# Altium PCB LKS_Motor_0406.PcbDoc (part 1 of 4)
Units mm, origin at the board's own origin, x right, y up, seen from the top; angles counter-clockwise.
Board outline 117 x 10 mm, 2 copper layers (Top Layer, Bottom Layer); 114 components, 77 nets, 340 pads, 169 vias.
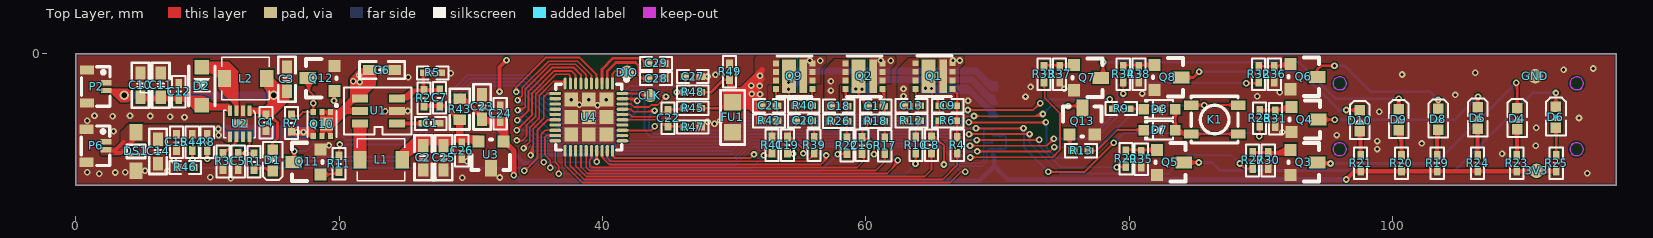
[diagram p0: Top Layer view]
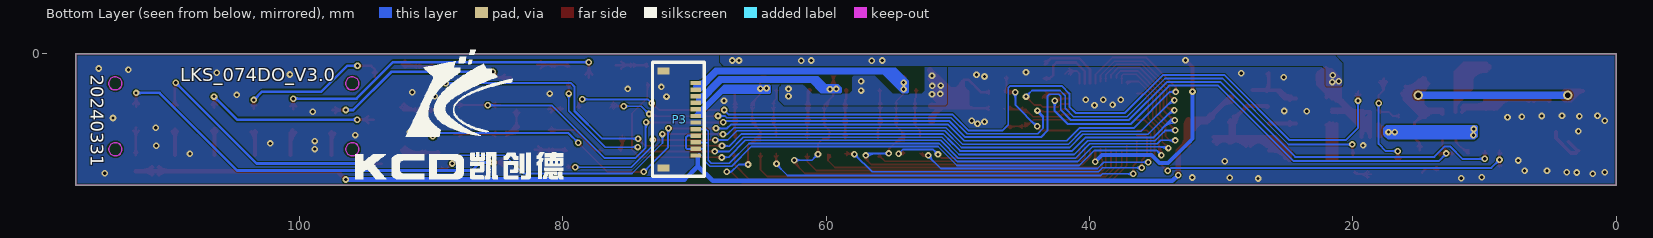
[diagram p1: Bottom Layer view, seen from below]
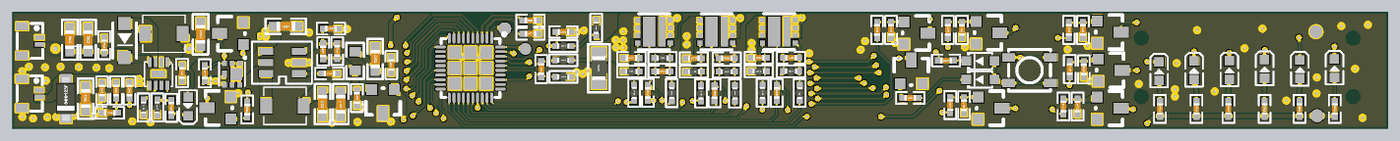
[diagram p5: 3D render of the assembled board from above, using the file's embedded part models]

## Layer stack, top to bottom
Top Solder: solder mask 0.0102, Solder Resist, Dk 3.5
Top Layer: signal copper 0.0356
Dielectric1: core 0.32, FR-4, Dk 4.8
Bottom Layer: signal copper 0.0356
Bottom Solder: solder mask 0.0102, Solder Resist, Dk 3.5

## Board outline
0,-10 0,0 117,0 117,-10

## Design rules (kind name [scope] priority, off if disabled: settings)
Clearance [All] p1: gap=0.1 ignorepadtopadclearanceinfootprint=FALSE except(0: Arc-Hole Track-Hole SMDPad-Hole THPad-Hole Via-Hole Fill-Hole Poly-Hole Region-Hole Text-Hole)
ComponentClearance [All] p1 off: gap=0.254 collisioncheckmode=3 verticalgap=0.254 showdistances=FALSE
FabricationTestpoint [(IsPad And (OnTopLayer Or OnBottomLayer))] p1: side=3 testpointundercomponent=TRUE minsize=1.016 maxsize=2.54 preferedsize=1.524 minholesize=0 maxholesize=1.016 preferedholesize=0.813 testpointgrid=0.025 allowsidetop=TRUE allowsidebottom=TRUE usegrid=TRUE gridtolerance=0
HoleSize [All] p1: absolutevalues=TRUE maxlimit=5.08 minlimit=0.025 maxpercent=80.000 minpercent=20.000
HoleToHoleClearance [All] p1: gap=0.127 allowstackedmicrovias=TRUE
MinimumSolderMaskSliver [All] p1 off: minsoldermaskwidth=0.127
PlaneClearance [All] p1: clearance=0.178
PlaneConnect [All] p1: planeconnectstyle=Direct reliefexpansion=0.508 reliefentries=4 reliefconductorwidth=0.254 reliefairgap=0.254
PolygonConnect [All] p1: connectstyle=Direct reliefconductorwidth=0.254 reliefentries=4 polygonreliefangle="90 Angle" airgapwidth=0.254
RoutingVias [All] p1: holewidth=0.457 width=0.762 viastyle="Through Hole" minholewidth=0.2 minwidth=0.5 maxholewidth=1 maxwidth=2
SilkToSilkClearance [All] p1 off: silktosilkclearance=0
SilkToSolderMaskClearance SilkscreenOverComponentPads [IsPad] p1 off: minsilkscreentomaskgap=0.127 clearancetoexposedcopper=TRUE
SolderMaskExpansion [All] p1: expansion=0.102 istentingtop=FALSE
Width [All] p1: maxlimit=2.54 minlimit=0.127 preferedwidth=0.203
21 further rules are at their usual default settings.

## Components (designator, comment, footprint, x,y, rotation, side; value= is the part's Value field where it differs from the comment)
3V3 "test" piot#1 110.947,-8.89 r0 top
C1 "1uF/16V" "C 0402_M" 26.975,-5.283 r180 top
C2 "10uF/16V" "C 0603_M" 26.391,-7.899 r90 top
C3 "22uF/25V" "C 0603_M" 16.027,-1.93 r270 top
C4 "1uF/25V" "C 0402_M" 14.453,-5.232 r270 top
C5 "103" "R 0402_M" 12.344,-8.179 r90 top
C6 "10uF/16V" "C 0603_M" 23.266,-1.245 r180 top
C7 "10pF/16V" "C 0402_M" 27.635,-3.353 r270 top
C8 "4.7uF/25V" "C 0402_M" 64.999,-6.934 r270 top
C9 "1nF" "C 0402_M" 66.221,-3.943 r0 top
C10 "22uF/25V" "C 0603_M" 4.902,-2.388 r270 top
C11 "22uF/25V" "C 0603_M" 6.452,-2.388 r270 top
C12 "4.7uF/25V" "C 0402_M" 7.823,-2.87 r270 top
C13 "1nF" "C 0402_M" 63.475,-3.943 r0 top
C14 "22uF/25V" "C 0603_M" 6.248,-7.417 r90 top
C15 "1uF/25V" "C 0402_M" 7.645,-6.731 r90 top
C16 "4.7uF/25V" "C 0402_M" 59.715,-6.96 r270 top
C17 "1nF" "C 0402_M" 60.755,-3.978 r0 top
C18 "1nF" "C 0402_M" 57.961,-3.978 r0 top
C19 "4.7uF/25V" "C 0402_M" 54.051,-6.934 r270 top
C20 "1nF" "C 0402_M" 55.294,-5.096 r0 top
C21 "1nF" "C 0402_M" 52.653,-3.953 r0 top
C22 "NC" "C 0402_M" 44.983,-4.902 r90 top
C23 "10uF/10V" "C 0603_M" 30.861,-4.039 r270 top
C24 "100nF" "C 0402_M" 32.233,-4.547 r90 top
C25 "10uF/10V" "C 0603_M" 27.94,-7.899 r90 top
C26 "100nF/10V" "C 0402_M" 29.312,-7.366 r270 top
C27 "1nF/50V" "C 0402_M" 46.863,-1.727 r180 top
C28 "100nF/50V" "C 0402_M" 44.069,-1.88 r0 top
C29 "1uF/10V" "C 0402_M" 44.069,-0.737 r180 top
CLK "test" piot#2 43.637,-3.175 r0 top
D1 "LED_R" 0603-LED 14.884,-8.179 r90 top
D2 "SS34" SOD123FL 9.576,-2.235 r270 top
D3 "4148" SOD-323 82.321,-4.216 r0 top
D4 "LED_R" 0603-LED 109.55,-4.851 r270 top
D5 "LED_R" 0603-LED 106.553,-4.801 r270 top
D6 "LED_R" 0603-LED 112.497,-4.75 r270 top
D7 "4148" SOD-323 82.321,-5.791 r0 top
D8 "LED_R" 0603-LED 103.556,-4.902 r270 top
D9 "LED_R" 0603-LED 100.559,-4.928 r270 top
D10 "LED_R" 0603-LED 97.587,-5.004 r270 top
DIO "test" piot#1 41.885,-1.448 r0 top
DS1 "SMF12CA-MS" SOD-123F 4.572,-7.417 r90 top
FU1 "0.05R" "R 0805_M" 49.886,-4.826 r90 top
GND "test" piot#1 110.846,-1.702 r0 top
K1 "K1" SMD3.3X3.3X2 86.5,-5 r0 top
L1 "6.8uH" "SMD3.5X3 .2- duplicate" 23.19,-8.052 r0 top
L2 "4.7uH" "SMD3.5X3 .2- duplicate" 12.903,-1.88 r0 top
P2 "Header 2" CONN_SMD_2P_0.6 1.448,-2.515 r270 top
P3 "Header 12" SMD-12 69.901,-7.722 r90 bottom
P6 "Header 2" CONN_SMD_2P_0.6 1.422,-7.01 r270 top
Q1 "CJBM3020" DFN-3X3_8 66.577,-2.672 r90 top
Q2 "CJBM3020" DFN-3X3_8 61.263,-2.681 r90 top
Q3 "J3Y" SOT-23 92.253,-7.29 r270 top
Q4 "J3Y" SOT-23 92.329,-4.039 r270 top
Q5 "J3Y" SOT-23 82.118,-7.29 r270 top
Q6 "J3Y" SOT-23 92.253,-0.787 r270 top
Q7 "J3Y" SOT-23 75.819,-0.864 r270 top
Q8 "J3Y" SOT-23 81.94,-0.838 r270 top
Q9 "CJBM3020" DFN-3X3_8 55.955,-2.681 r90 top
Q10 "CJMP2011" DFN-6-2X2 18.44,-5.08 r180 top
Q11 "J3Y" SOT-23 18.593,-9.169 r90 top
Q12 "J3Y" SOT-23 19.66,-2.819 r90 top
Q13 "J3Y" SOT-23 75.489,-6.147 r0 top
R1 "4.7K" "C 0402_M" 13.538,-8.204 r270 top
R2 "2.5M" "C 0402_M" 26.441,-3.378 r90 top
R3 "510" "R 0402_M" 11.176,-8.179 r270 top
R4 "10R" "R 0402_M" 66.953,-6.94 r270 top
R5 "340K" "C 0402_M" 27.102,-1.448 r0 top
R6 "10K" "R 0402_M" 66.221,-5.086 r180 top
R7 "12K" "C 0402_M" 16.383,-5.258 r270 top
R8 "47K" "C 0402_M" 9.982,-6.731 r90 top
R9 "10K" "C 0402_M" 79.4,-4.166 r180 top
R10 "10R" "R 0402_M" 63.805,-6.934 r270 top
R11 "2K" "C 0402_M" 19.99,-8.357 r90 top
R12 "10K" "R 0402_M" 63.475,-5.086 r180 top
R13 "20K" "C 0402_M" 76.352,-7.366 r180 top
R17 "10R" "R 0402_M" 61.443,-6.975 r270 top
R18 "10K" "R 0402_M" 60.755,-5.121 r180 top
R19 "1K" "C 0402_M" 103.403,-8.306 r270 top
R20 "1K" "C 0402_M" 100.686,-8.306 r270 top
R21 "1K" "C 0402_M" 97.587,-8.306 r270 top
R22 "10R" "R 0402_M" 58.571,-6.975 r270 top
R23 "1K" "C 0402_M" 109.449,-8.306 r270 top
R24 "1K" "C 0402_M" 106.477,-8.306 r270 top
R25 "1K" "C 0402_M" 112.446,-8.306 r270 top
R26 "10K" "R 0402_M" 57.961,-5.121 r180 top
R27 "10K" "C 0402_M" 89.383,-8.103 r270 top
R28 "10K" "C 0402_M" 89.916,-4.902 r270 top
R29 "10K" "C 0402_M" 79.756,-7.976 r270 top
R30 "100K" "C 0402_M" 90.576,-8.103 r270 top
R31 "100K" "C 0402_M" 91.11,-4.928 r270 top
R32 "10K" "C 0402_M" 89.84,-1.549 r270 top
R33 "10K" "C 0402_M" 73.533,-1.549 r270 top
R34 "10K" "C 0402_M" 79.553,-1.549 r270 top
R35 "100K" "C 0402_M" 80.924,-8.001 r270 top
R36 "100K" "C 0402_M" 91.034,-1.549 r270 top
R37 "100K" "C 0402_M" 74.727,-1.549 r270 top
R38 "100K" "C 0402_M" 80.747,-1.549 r270 top
R39 "10R" "R 0402_M" 56.082,-6.95 r270 top
R40 "10K" "R 0402_M" 55.294,-3.953 r180 top
R41 "10R" "R 0402_M" 52.883,-6.934 r270 top
R42 "10K" "R 0402_M" 52.653,-5.096 r180 top
R43 "0R/NC" 0603 29.159,-4.216 r90 top
R44 "2M" "C 0402_M" 8.839,-6.731 r270 top
R45 "1K1%" "R 0402_M" 46.863,-4.14 r180 top
R46 "470K" "C 0402_M" 8.306,-8.636 r180 top
R47 "1K1%" "R 0402_M" 46.863,-5.563 r180 top
R48 "1K" "R 0402_M" 46.863,-2.921 r180 top
R49 "10R" "R 0402_M" 49.657,-1.372 r90 top
U1 "CS5503R" SOT23-6L 23.038,-4.394 r180 top
U2 "CS5090EL" DFN2X2_8_0.5 12.446,-5.309 r180 top
U3 "CJ6376A33MY" SOT-23 32.487,-6.655 r180 top
U4 "LKS32MC074DOF8Q8" QFN40 38.989,-4.801 r270 top

## Footprints (in the part's own frame and the unit in brackets; to place one, negate y for a bottom-side part, rotate by r counter-clockwise, add the part's x,y. Pads: shape width x height; smd on the part's side, far side on the other; paste and mask are expansions set on the pad)
0603 [mm]
  rect 0.8x0.955 smd: 1(-0.795,0) 2(0.795,0)
  silkscreen extent -1.53,-0.75 1.56,0.75
0603-LED [mm]
  rect 0.8x0.8 smd: 1(0.876,-0.073) 2(-0.723,-0.08)
  silkscreen extent -1.41,-0.82 1.47,0.68
"C 0402_M" [mil] "无极性贴片电容"
  rect 26x20 smd: 1(-24,0) 2(24,0)
  silkscreen extent -47,-20 47,20, body extent -20,-10 20,10, height 21
"C 0603_M" [mil] "无极性贴片电容"
  rect 40x30 smd: 1(-36.5,0) 2(36.5,0)
  silkscreen extent -68,-26 68,26, body extent -31,-16 31,16, height 32
CONN_SMD_2P_0.6 [mm]
  rect 0.4x0.8 smd: 1(-0.324,0.871) 2(0.276,0.871)
  rect 0.7x1.05 smd: 3(1.226,-0.604) 4(-1.274,-0.604)
  silkscreen extent -1.52,-1.01 1.48,1.15
DFN2X2_8_0.5 [mm]
  rect 0.3x0.8 smd: 1(-0.75,-1) 2(-0.25,-1) 3(0.25,-1) 4(0.75,-1) 5(0.75,1) 6(0.25,1) 7(-0.25,1) 8(-0.75,1)
  rect 1.2x0.6 smd: 9(0,0)
  silkscreen extent -1.19,-1.02 1.2,1.08
DFN-3X3_8 [mil]
  rect 17x18 smd: 1(0,0) 2(25.59,0) 3(51.18,0) 4(76.77,0) 5(76.77,109.58) 6(51.18,109.58) 7(25.59,109.58) 8(0,109.58)
  rect 100x23 smd: 9(38.33,27.5)
  rect 100x42 smd: 10(38.33,70.83)
  silkscreen extent -23,2 99,106
DFN-6-2X2 [mm]
  rect 0.4x0.45 smd: 1(-0.904,-0.671) 2(-0.254,-0.671) 3(0.396,-0.671) 4(0.396,1.179) 5(-0.254,1.179) 6(-0.904,1.179)
  rect 1x1.02 smd: 7(-0.604,0.254)
  rect 0.4x0.66 smd: 8(0.396,0.254)
  silkscreen extent -1.45,-1.25 0.85,1.25
piot#1 [mm]
  round 1.1 smd: 1(0,0)
piot#2 [mm]
  round 1 smd: 1(0,0)
QFN40 [mm]
  rect 1.05x1.05 smd: 0(-1.32,-1.352) 0(-1.32,1.308) 0(-1.32,-0.022) 0(0.01,-0.022) 0(0.01,1.308) 0(0.01,-1.352) 0(1.34,-0.022) 0(1.34,-1.352) 0(1.34,1.308)
  rect 0.9x0.24 smd: 1(-2.54,1.778)
  oval 0.9x0.24 smd: 2(-2.54,1.378) 3(-2.54,0.978) 4(-2.54,0.578) 5(-2.54,0.178) 6(-2.54,-0.222) 7(-2.54,-0.622) 8(-2.54,-1.022) 9(-2.54,-1.422) 10(-2.54,-1.822) 21(2.56,-1.822) 22(2.56,-1.422) 23(2.56,-1.022) 24(2.56,-0.622) 25(2.56,-0.222) 26(2.56,0.178) 27(2.56,0.578) 28(2.56,0.978) 29(2.56,1.378) 30(2.56,1.778)
  oval 0.24x0.9 smd: 11(-1.79,-2.572) 12(-1.39,-2.572) 13(-0.99,-2.572) 14(-0.59,-2.572) 15(-0.19,-2.572) 16(0.21,-2.572) 17(0.61,-2.572) 18(1.01,-2.572) 19(1.41,-2.572) 20(1.81,-2.572) 31(1.81,2.528) 32(1.41,2.528) 33(1.01,2.528) 34(0.61,2.528) 35(0.21,2.528) 36(-0.19,2.528) 37(-0.59,2.528) 38(-0.99,2.528) 39(-1.39,2.528) 40(-1.79,2.528)
  silkscreen extent -2.98,-2.52 2.51,2.97
"R 0402_M" [mil] "1/16W贴片电阻"
  rect 26x20 smd: 1(-24,0) 2(24,0)
  silkscreen extent -47,-20 47,20, body extent -20,-10 20,10, height 12
"R 0805_M" [mil] "1/8W贴片电阻"
  rect 50x50 smd: 1(-45,0) 2(45,0)
  silkscreen extent -81,-36 81,36, body extent -39,-25 39,25, height 20
SMD3.3X3.3X2 [mm]
  rect 1.1x0.7 smd: 1(-1.775,1.1) 1(1.775,1.1) 2(-1.775,-1.1) 2(1.775,-1.1)
  silkscreen extent -1.78,-1.78 1.78,1.78
"SMD3.5X3 .2- duplicate" [mm]
  rect 1x1.3 smd: 1(-1.6,0) 2(1.6,0)
  silkscreen extent -1.8,-1.6 1.8,1.6
SMD-12 [mil]
  rect 22x36 smd: 0(252.38,97.5) 0/2(-37.62,97.5)
  rect 13x32 smd: 1(216.53,0) 2(196.85,0) 3(177.17,0) 4(157.48,0) 5(137.79,0) 6(118.11,0) 7(98.42,0) 8(78.74,0) 9(59.05,0) 10(39.37,0) 11(19.69,0) 12(0,0)
  silkscreen extent -62,-25 279,130
SOD123FL [mm]
  rect 1.1x1.1 smd: 1(-1.228,-0.006) 2(1.673,-0.006)
  silkscreen extent -1.28,-1.01 1.72,0.99
SOD-123F [mm]
  rect 1.25x1 smd: 1(1.475,0) 2(-1.475,0)
  silkscreen extent -0.5,-0.7 0.5,0.7, body extent -1.9,-0.85 1.85,0.85, height 1.2
SOD-323 [mm]
  rect 0.8x0.8 smd: 1(1.2,0) 2(-1.2,0)
  silkscreen extent -1.1,-0.7 1,0.7
SOT23-6L [mm]
  rect 1.2x0.6 smd: 1(-1.349,0.899) 2(-1.349,-0.051) 3(-1.349,-1.001) 4(1.451,-1.001) 5(1.451,-0.051) 6(1.451,0.899)
  silkscreen extent -2.45,-1.85 2.65,1.75
SOT-23 [mil]
  rect 36x36 smd: 1(0,0) 2(75,0)
  rect 36x50 smd: 3(38,80)
  silkscreen extent -20,-5 95,85

## Part data
C1 C4 C24: library part CAP
C2 C3 C5 C6 C7 C8 C9 C10 C11 C12 C13 C14 C15 C16 C17 C18 C19 C20 C21 C22 C23 C25 C26: library part CAP, "Capacitor"
C27 C28 C29: library part C, "Capacitor"
D1 D4 D5 D6 D8 D9 D10: library part LED
D2 D3 D7: library part Diode, "Default Diode"
DS1: library part DIODE-3, "12V/19.9V"
FU1 R4 R6 R10 R12 R17 R18 R22 R26 R39 R40 R41 R42 R45 R47 R48 R49: library part RAS
L1 L2: library part Inductor, "Inductor"
P2 P6: "Header, 2-Pin"
P3: "Header, 12-Pin"
Q3 Q4 Q5 Q6 Q7 Q8 Q11 Q12 Q13: library part NPN, "NPN Transistor"
R1 R2 R3 R5 R7 R8 R9 R11 R13 R19 R20 R21 R23 R24 R25 R27 R28 R29 R30 R31 R32 R33 R34 R35 R36 R37 R38 R43 R44 R46: library part RES2_S
U3: library part 78L15
U4: library part LKS32MC074DF8Q8, "芯片"

## Via types
v1: diameter 0.5, hole 0.25, Top Layer to Bottom Layer, 167 vias
v2: diameter 0.7, hole 0.4, Top Layer to Bottom Layer, 2 vias

## Nets (pads, with @x,y where several pads share a name; then routed paths per layer and width w, separated by ;. In a path a pad name is that pad's centre, name@x,y a point inside that pad or via, vN(x,y) a via of type N, cw(c..) or ccw(c..) an arc to the next point about the centre after c; other vN are vias at no path point)
1ST: R29.2 U4.6 | length 73
  Top Layer w0.127: v1(33.553,-4.293) 33.858,-4.293 34.138,-4.013 ; U4.6@38.767,-2.108 38.767,-1.6 37.954,-0.787 36.043,-0.787 34.138,-2.692 34.138,-4.013 ; v1(68.428,-6.553) 73.152,-6.553 v1(73.177,-6.528) ; v1@79.096,-8.585 R29.2@79.756,-8.585 ; 34.138,-4.013 cw(c33.799,-3.675) 33.622,-4.119 ccw(c33.799,-3.675) 34.138,-4.013 ; 38.767,-1.794 cw(c38.631,-1.794) 38.727,-1.891 ccw(c38.631,-1.794) 38.767,-1.794 ; 38.767,-1.794 ccw(c38.903,-1.794) 38.807,-1.891 cw(c38.903,-1.794) 38.767,-1.794 ; 68.878,-6.553 cw(c68.878,-6.103) 68.559,-6.421 ccw(c68.878,-6.103) 68.878,-6.553 ; 68.878,-6.553 ccw(c68.878,-7.003) 68.559,-6.685 cw(c68.878,-7.003) 68.878,-6.553 ; v1@79.296,-8.585 cw(c79.296,-9.045) 79.621,-8.72 ccw(c79.296,-9.045) v1@79.296,-8.585 ; v1@79.296,-8.585 ccw(c79.296,-8.125) 79.621,-8.45 cw(c79.296,-8.125) v1@79.296,-8.585 ; v1@33.528,-4.355 ccw(c33.644,-4.065) 33.865,-4.286 cw(c33.644,-4.065) v1@33.528,-4.355 ; v1@33.575,-4.237 ccw(c33.722,-3.87) 34.001,-4.15 cw(c33.722,-3.87) v1@33.575,-4.237 ; 72.666,-6.553 ccw(c72.666,-6.016) 73.046,-6.396 cw(c72.666,-6.016) 72.666,-6.553 ; 72.788,-6.553 cw(c72.788,-6.917) 73.046,-6.66 ccw(c72.788,-6.917) 72.788,-6.553 ; v1@79.202,-8.742 cw(c79.582,-9.122) 79.582,-8.585 ccw(c79.582,-9.122) v1@79.202,-8.742 ; v1@79.202,-8.479 ccw(c79.459,-8.222) 79.459,-8.585 cw(c79.459,-8.222) v1@79.202,-8.479
  Bottom Layer w0.127: v1(33.553,-4.293) 33.731,-4.293 35.56,-6.121 40.513,-6.121 41.504,-7.112 49.733,-7.112 51.003,-5.842 66.777,-5.842 67.488,-6.553 v1(68.428,-6.553) ; v1(73.177,-6.528) 73.177,-6.985 74.803,-8.611 v1(79.07,-8.611) ; 67.977,-6.553 cw(c67.977,-7.003) 68.296,-6.685 ccw(c67.977,-7.003) 67.977,-6.553 ; 67.977,-6.553 ccw(c67.977,-6.103) 68.296,-6.421 cw(c67.977,-6.103) 67.977,-6.553 ; 73.177,-6.978 cw(c73.628,-6.978) 73.309,-6.66 ccw(c73.628,-6.978) 73.177,-6.978 ; 73.177,-6.978 ccw(c72.727,-6.978) 73.046,-6.66 cw(c72.727,-6.978) 73.177,-6.978 ; 78.62,-8.611 cw(c78.62,-9.061) 78.938,-8.742 ccw(c78.62,-9.061) 78.62,-8.611 ; 78.62,-8.611 ccw(c78.62,-8.16) 78.938,-8.479 cw(c78.62,-8.16) 78.62,-8.611 ; v1@33.553,-4.479 cw(c33.553,-5.359) 34.175,-4.737 ccw(c33.553,-5.359) v1@33.553,-4.479 ; v1@33.553,-4.352 cw(c33.553,-4.925) 33.958,-4.52 ccw(c33.553,-4.925) v1@33.553,-4.352
2ND: R27.2 U4.5 | length 81.4
  Top Layer w0.127: v1(33.553,-3.531) 33.909,-3.175 33.909,-2.565 35.916,-0.559 38.1,-0.559 39.167,-1.626 U4.5@39.167,-2.108 ; v1(67.843,-6.121) 67.869,-6.096 v1(72.441,-6.096) ; v1(88.417,-8.331) 88.824,-8.738 89.357,-8.738 R27.2@89.383,-8.712 ; 33.872,-3.212 cw(c33.553,-2.894) 33.553,-3.344 ccw(c33.553,-2.894) 33.872,-3.212 ; 33.872,-3.212 ccw(c34.19,-3.531) 33.74,-3.531 cw(c34.19,-3.531) 33.872,-3.212 ; 39.167,-1.794 cw(c39.031,-1.794) 39.127,-1.891 ccw(c39.031,-1.794) 39.167,-1.794 ; 39.167,-1.794 ccw(c39.303,-1.794) 39.207,-1.891 cw(c39.303,-1.794) 39.167,-1.794 ; 71.991,-6.096 cw(c71.991,-6.546) 72.309,-6.228 ccw(c71.991,-6.546) 71.991,-6.096 ; 71.991,-6.096 ccw(c71.991,-5.646) 72.309,-5.964 cw(c71.991,-5.646) 71.991,-6.096 ; 88.736,-8.65 cw(c89.054,-8.331) 88.604,-8.331 ccw(c89.054,-8.331) 88.736,-8.65 ; 88.736,-8.65 ccw(c88.417,-8.968) 88.417,-8.518 cw(c88.417,-8.968) 88.736,-8.65 ; v1@67.975,-6.253 cw(c68.355,-6.633) 68.355,-6.096 ccw(c68.355,-6.633) v1@67.975,-6.253 ; v1@67.975,-5.99 ccw(c68.232,-5.732) 68.232,-6.096 cw(c68.232,-5.732) v1@67.975,-5.99 ; 88.861,-8.738 ccw(c88.861,-8.191) 89.248,-8.578 cw(c88.861,-8.191) 88.861,-8.738 ; 88.984,-8.738 cw(c88.984,-9.111) 89.248,-8.847 ccw(c88.984,-9.111) 88.984,-8.738
  Bottom Layer w0.127: v1(33.553,-3.531) 33.731,-3.531 36.093,-5.893 40.64,-5.893 41.605,-6.858 49.657,-6.858 50.902,-5.613 67.005,-5.613 67.513,-6.121 v1(67.843,-6.121) ; v1(72.441,-6.096) 72.441,-6.782 74.752,-9.093 83.007,-9.093 84.404,-7.696 87.782,-7.696 v1(88.417,-8.331) ; 72.441,-6.546 cw(c72.891,-6.546) 72.573,-6.228 ccw(c72.891,-6.546) 72.441,-6.546 ; 72.441,-6.546 ccw(c71.991,-6.546) 72.309,-6.228 cw(c71.991,-6.546) 72.441,-6.546 ; 88.099,-8.013 cw(c87.781,-8.331) 88.231,-8.331 ccw(c87.781,-8.331) 88.099,-8.013 ; 88.099,-8.013 ccw(c88.417,-7.694) 88.417,-8.145 cw(c88.417,-7.694) 88.099,-8.013 ; v1@33.553,-3.717 cw(c33.553,-4.597) 34.175,-3.975 ccw(c33.553,-4.597) v1@33.553,-3.717 ; v1@33.553,-3.59 cw(c33.553,-4.163) 33.958,-3.758 ccw(c33.553,-4.163) v1@33.553,-3.59
3RD: R28.2 U4.4 | length 87.3
  Top Layer w0.15: v1@33.401,-2.845 v1(33.452,-2.896) 33.452,-2.54 ; U4.4@39.567,-2.261 39.567,-1.594 38.252,-0.279 35.712,-0.279 33.452,-2.54 ; v1(68.377,-5.664) 71.831,-5.664 v1@71.984,-5.512 ; v1(73.863,-8.966) 76.632,-8.966 v1(78.842,-6.756) ; v1@89.916,-6.248 R28.2@89.916,-5.512 ; 33.452,-2.54 cw(c33.178,-2.54) 33.345,-2.757 ccw(c33.178,-2.54) 33.452,-2.54 ; 33.452,-2.54 ccw(c33.726,-2.54) 33.559,-2.757 cw(c33.726,-2.54) 33.452,-2.54 ; 68.799,-5.664 cw(c68.799,-5.242) 68.501,-5.54 ccw(c68.799,-5.242) 68.799,-5.664 ; 68.799,-5.664 ccw(c68.799,-6.087) 68.501,-5.788 cw(c68.799,-6.087) 68.799,-5.664 ; 71.561,-5.664 cw(c71.561,-6.087) 71.86,-5.788 ccw(c71.561,-6.087) 71.561,-5.664 ; 71.561,-5.664 ccw(c71.561,-5.242) 71.86,-5.54 cw(c71.561,-5.242) 71.561,-5.664 ; 74.286,-8.966 cw(c74.286,-8.544) 73.987,-8.842 ccw(c74.286,-8.544) 74.286,-8.966 ; 74.286,-8.966 ccw(c74.286,-9.389) 73.987,-9.09 cw(c74.286,-9.389) 74.286,-8.966 ; 78.543,-7.055 cw(c78.842,-7.354) 78.842,-6.931 ccw(c78.842,-7.354) 78.543,-7.055 ; 78.543,-7.055 ccw(c78.244,-6.756) 78.667,-6.756 cw(c78.244,-6.756) 78.543,-7.055 ; 89.916,-6.02 cw(c90.348,-6.02) 90.043,-5.715 ccw(c90.348,-6.02) 89.916,-6.02 ; 89.916,-6.02 ccw(c89.484,-6.02) 89.789,-5.715 cw(c89.484,-6.02) 89.916,-6.02 ; v1@89.767,-6.15 ccw(c89.407,-5.79) 89.916,-5.79 cw(c89.407,-5.79) v1@89.767,-6.15 ; 89.916,-5.913 ccw(c90.252,-5.913) 90.014,-6.15 cw(c90.252,-5.913) 89.916,-5.913
  Bottom Layer w0.15: v1(33.452,-2.896) 33.909,-2.896 36.652,-5.639 40.767,-5.639 41.732,-6.604 49.53,-6.604 50.777,-5.357 67.231,-5.357 67.539,-5.664 v1(68.377,-5.664) ; v1(71.984,-5.664) 72.009,-5.69 72.009,-7.112 v1(73.863,-8.966) ; v1(78.842,-6.756) 79.578,-6.02 89.637,-6.02 v1(89.891,-6.274) ; 33.874,-2.896 cw(c33.874,-2.473) 33.576,-2.772 ccw(c33.874,-2.473) 33.874,-2.896 ; 33.874,-2.896 ccw(c33.874,-3.318) 33.576,-3.019 cw(c33.874,-3.318) 33.874,-2.896 ; 67.954,-5.664 cw(c67.954,-6.087) 68.253,-5.788 ccw(c67.954,-6.087) 67.954,-5.664 ; 67.954,-5.664 ccw(c67.954,-5.242) 68.253,-5.54 cw(c67.954,-5.242) 67.954,-5.664 ; 73.564,-8.667 cw(c73.266,-8.966) 73.688,-8.966 ccw(c73.266,-8.966) 73.564,-8.667 ; 73.564,-8.667 ccw(c73.863,-8.369) 73.863,-8.791 cw(c73.863,-8.369) 73.564,-8.667 ; 79.14,-6.458 cw(c78.842,-6.159) 78.842,-6.581 ccw(c78.842,-6.159) 79.14,-6.458 ; 79.14,-6.458 ccw(c79.439,-6.756) 79.017,-6.756 cw(c79.439,-6.756) 79.14,-6.458 ; v1@71.86,-5.788 cw(c71.5,-6.148) 72.009,-6.148 ccw(c71.5,-6.148) v1@71.86,-5.788 ; 72.009,-6.025 cw(c72.345,-6.025) 72.107,-5.788 ccw(c72.345,-6.025) 72.009,-6.025
+3.3V: 3V3.1 C23.2 C24.1 P3.12 R19.2 R20.2 R21.2 R23.2 R24.2 R25.2 R43.2 U3.1 | length 117.9
  Top Layer w0.3: U3.1@32.385,-6.477 U3.1@32.487,-6.579
  Top Layer w0.35: v1(96.495,-9.55) 97.13,-8.915 R21.2@97.587,-8.915 R19.2@103.403,-8.915 R25.2@112.446,-8.915 ; 109.981,-8.915 ccw(c109.981,-7.923) 110.682,-8.625 cw(c109.981,-7.923) 109.981,-8.915 ; 110.103,-8.915 cw(c110.103,-9.734) 110.682,-9.155 ccw(c110.103,-9.734) 110.103,-8.915 ; 3V3.1@111.212,-9.155 cw(c111.791,-9.734) 111.791,-8.915 ccw(c111.791,-9.734) 3V3.1@111.212,-9.155 ; 3V3.1@111.212,-8.625 ccw(c111.914,-7.923) 111.914,-8.915 cw(c111.914,-7.923) 3V3.1@111.212,-8.625
  Top Layer w0.4: R43.2@29.21,-3.294 29.342,-3.294 C23.2@30.886,-4.839 ; 31.598,-5.156 31.598,-5.182 32.385,-5.969 ; U3.1@32.385,-6.477 32.385,-5.969 ; C24.1@32.477,-4.988 cw(c32.025,-5.44) 32.664,-5.44 ; U3.1@32.487,-6.655 32.664,-6.477 32.664,-5.563 32.067,-4.966 30.886,-4.966 31.077,-5.156 31.953,-5.156 32.385,-5.588 32.385,-5.969 ; U3.1@32.487,-6.579 33.274,-7.366 v1(33.274,-9.22) ; 31.298,-4.966 cw(c31.298,-4.529) 30.989,-4.838 ccw(c31.298,-4.529) 31.298,-4.966 ; 31.298,-4.966 ccw(c31.298,-5.403) 30.989,-5.094 cw(c31.298,-5.403) 31.298,-4.966 ; C24.1@32.194,-5.271 cw(c31.06,-6.405) 32.664,-6.405 ccw(c31.06,-6.405) C24.1@32.194,-5.271 ; C24.1@32.194,-5.271 cw(c31.734,-5.731) 32.385,-5.731 ccw(c31.734,-5.731) C24.1@32.194,-5.271 ; 32.385,-5.969 ccw(c32.963,-5.969) 32.633,-6.444 cw(c32.963,-5.969) 32.385,-5.969 ; R43.2@29.237,-3.621 cw(c29.237,-4.665) 29.975,-3.927 ccw(c29.237,-4.665) R43.2@29.237,-3.621 ; C23.2@30.534,-4.486 cw(c30.182,-4.839) 30.68,-4.839 ccw(c30.182,-4.839) C23.2@30.534,-4.486 ; C23.2@30.595,-4.548 ccw(c30.861,-4.282) 30.861,-4.658 cw(c30.861,-4.282) C23.2@30.595,-4.548 ; C23.2@30.989,-4.965 ccw(c31.451,-4.502) 31.451,-5.156 cw(c31.451,-4.502) C23.2@30.989,-4.965 ; 31.826,-4.966 cw(c31.826,-5.486) 32.194,-5.118 ccw(c31.826,-5.486) 31.826,-4.966 ; C24.1@32.203,-5.277 cw(c31.973,-5.619) 32.385,-5.619 ccw(c31.973,-5.619) C24.1@32.203,-5.277 ; C24.1@32.227,-5.286 cw(c32.171,-5.776) 32.664,-5.776 ccw(c32.171,-5.776) C24.1@32.227,-5.286 ; C24.1@32.233,-5.286 cw(c32.233,-5.662) 32.498,-5.396 ccw(c32.233,-5.662) C24.1@32.233,-5.286 ; U3.1@32.305,-6.473 ccw(c31.436,-5.605) 32.664,-5.605 cw(c31.436,-5.605) U3.1@32.305,-6.473 ; U3.1@32.487,-6.912 cw(c32.487,-7.717) 33.056,-7.148 ccw(c32.487,-7.717) U3.1@32.487,-6.912 ; U3.1@32.744,-6.655 ccw(c33.181,-6.655) 32.872,-6.964 cw(c33.181,-6.655) U3.1@32.744,-6.655
  Bottom Layer w0.35: v1(33.274,-9.22) 33.706,-9.652 68.631,-9.652 69.748,-8.534 ; P3.12@69.748,-7.772 69.748,-8.534 ; v1(96.495,-9.55) 70.764,-9.55 69.748,-8.534 ; P3.12@69.667,-7.715 cw(c69.469,-7.912) 69.748,-7.912 ccw(c69.469,-7.912) P3.12@69.667,-7.715
BAT_ADC: R44.2 R46.1 U4.16 | length 45.6
  Top Layer w0.15: R46.1@8.865,-8.585 v1(8.865,-8.052) R44.2@8.865,-7.341 ; v1(34.061,-8.89) 34.112,-8.89 35.052,-7.95 35.052,-5.817 35.858,-5.011 U4.16@36.417,-5.011 ; R46.1@8.865,-8.474 cw(c9.287,-8.474) 8.988,-8.176 ccw(c9.287,-8.474) R46.1@8.865,-8.474 ; R46.1@8.865,-8.474 ccw(c8.442,-8.474) 8.741,-8.176 cw(c8.442,-8.474) R46.1@8.865,-8.474 ; R44.2@8.865,-7.629 cw(c8.442,-7.629) 8.741,-7.928 ccw(c8.442,-7.629) R44.2@8.865,-7.629 ; R44.2@8.865,-7.629 ccw(c9.287,-7.629) 8.988,-7.928 cw(c9.287,-7.629) R44.2@8.865,-7.629 ; R46.1@8.713,-8.509 ccw(c8.346,-8.143) 8.865,-8.143 cw(c8.346,-8.143) R46.1@8.713,-8.509 ; R44.2@8.713,-7.543 cw(c8.346,-7.91) 8.865,-7.91 ccw(c8.346,-7.91) R44.2@8.713,-7.543 ; v1@8.865,-8.265 ccw(c9.21,-8.265) 8.966,-8.509 cw(c9.21,-8.265) v1@8.865,-8.265 ; 8.865,-7.788 cw(c9.21,-7.788) 8.966,-7.543 ccw(c9.21,-7.788) 8.865,-7.788 ; v1@34.061,-8.715 ccw(c34.061,-8.17) 34.447,-8.555 cw(c34.061,-8.17) v1@34.061,-8.715 ; v1@34.236,-8.89 cw(c34.536,-8.89) 34.324,-8.678 ccw(c34.536,-8.89) v1@34.236,-8.89
  Bottom Layer w0.15: v1(8.865,-8.052) 9.474,-8.661 10.008,-8.661 ; 9.652,-8.661 10.008,-8.661 ; 10.287,-8.661 12.167,-8.661 ; 24.384,-8.661 21.057,-8.661 ; v1(34.061,-8.89) 34.011,-8.89 33.782,-8.661 21.057,-8.661 ; 9.163,-8.351 cw(c9.462,-8.052) 9.04,-8.052 ccw(c9.462,-8.052) 9.163,-8.351 ; 9.163,-8.351 ccw(c8.865,-8.649) 8.865,-8.227 cw(c8.865,-8.649) 9.163,-8.351 ; 10.008,-8.661 10.109,-8.661 12.167,-8.661 ; 12.167,-8.661 21.057,-8.661
BLUE: R32.2 U4.7 | length 84.1
  Top Layer w0.15: v1(33.528,-5.055) 33.63,-5.055 34.392,-4.293 34.392,-2.845 36.195,-1.041 37.834,-1.041 38.367,-1.575 U4.7@38.367,-1.854 ; v1(67.92,-6.985) 72.847,-6.985 73.762,-6.985 v1(74.295,-6.452) v1@74.295,-6.604 ; v1(88.9,-2.235) 89.764,-2.235 R32.2@89.84,-2.159 ; 68.342,-6.985 cw(c68.342,-6.563) 68.043,-6.861 ccw(c68.342,-6.563) 68.342,-6.985 ; 68.342,-6.985 ccw(c68.342,-7.407) 68.043,-7.109 cw(c68.342,-7.407) 68.342,-6.985 ; 73.996,-6.75 cw(c74.295,-7.049) 74.295,-6.627 ccw(c74.295,-7.049) 73.996,-6.75 ; 73.996,-6.75 ccw(c73.698,-6.452) 74.12,-6.452 cw(c73.698,-6.452) 73.996,-6.75 ; 89.322,-2.235 cw(c89.322,-1.813) 89.024,-2.111 ccw(c89.322,-1.813) 89.322,-2.235 ; 89.322,-2.235 ccw(c89.322,-2.658) 89.024,-2.359 cw(c89.322,-2.658) 89.322,-2.235 ; 89.408,-2.235 cw(c89.408,-2.667) 89.713,-2.362 ccw(c89.408,-2.667) 89.408,-2.235 ; 89.408,-2.235 ccw(c89.408,-1.803) 89.713,-2.109 cw(c89.408,-1.803) 89.408,-2.235 ; v1@33.528,-4.88 ccw(c33.528,-4.212) 34,-4.684 cw(c33.528,-4.212) v1@33.528,-4.88 ; v1@33.703,-5.055 cw(c33.88,-5.055) 33.755,-4.929 ccw(c33.88,-5.055) v1@33.703,-5.055
  Bottom Layer w0.127: 50.766,-6.435 51.105,-6.096 66.446,-6.096 67.361,-7.01 67.894,-7.01 v1(67.92,-6.985) ; 67.408,-7.01 ccw(c67.408,-6.473) 67.788,-6.853 cw(c67.408,-6.473) 67.408,-7.01 ; 67.531,-7.01 cw(c67.531,-7.374) 67.788,-7.117 ccw(c67.531,-7.374) 67.531,-7.01
  Bottom Layer w0.15: v1(33.528,-5.055) 33.604,-4.978 33.782,-4.978 35.166,-6.363 40.323,-6.363 41.326,-7.366 49.835,-7.366 50.766,-6.435 ; v1(74.295,-6.452) 77.013,-6.452 79.121,-4.343 79.121,-2.489 79.375,-2.235 v1(88.9,-2.235) ; 74.717,-6.452 cw(c74.717,-6.029) 74.419,-6.328 ccw(c74.717,-6.029) 74.717,-6.452 ; 74.717,-6.452 ccw(c74.717,-6.874) 74.419,-6.575 cw(c74.717,-6.874) 74.717,-6.452 ; 88.478,-2.235 cw(c88.478,-2.658) 88.776,-2.359 ccw(c88.478,-2.658) 88.478,-2.235 ; 88.478,-2.235 ccw(c88.478,-1.813) 88.776,-2.111 cw(c88.478,-1.813) 88.478,-2.235 ; v1@33.528,-5.23 cw(c33.528,-6.449) 34.39,-5.587 ccw(c33.528,-6.449) v1@33.528,-5.23 ; v1@33.528,-5.08 cw(c33.528,-5.937) 34.134,-5.331 ccw(c33.528,-5.937) v1@33.528,-5.08 ; v1@33.528,-4.93 cw(c33.528,-5.425) 33.878,-5.075 ccw(c33.528,-5.425) v1@33.528,-4.93
CH_STAT: C5.2 R1.1 U2.8 U4.39 | length 51.3
  Top Layer w0.15: C5.2@12.344,-7.569 13.513,-7.569 R1.1@13.538,-7.595 ; v1@12.903,-7.468 12.903,-7.303 13.196,-7.01 ; U2.8@13.196,-6.309 13.196,-7.01 ; U4.39@41.517,-3.411 42.494,-3.411 v1(42.647,-3.563) ; C5.2@12.481,-7.569 cw(c12.481,-7.992) 12.779,-7.693 ccw(c12.481,-7.992) C5.2@12.481,-7.569 ; C5.2@12.481,-7.569 ccw(c12.481,-7.147) 12.779,-7.445 cw(c12.481,-7.147) C5.2@12.481,-7.569 ; v1@12.777,-7.569 cw(c12.777,-7.137) 12.471,-7.443 ccw(c12.777,-7.137) v1@12.777,-7.569 ; v1@12.777,-7.569 ccw(c12.777,-8.001) 12.471,-7.696 cw(c12.777,-8.001) v1@12.777,-7.569 ; 13.196,-7.01 ccw(c13.554,-7.368) 13.07,-7.518 cw(c13.554,-7.368) 13.196,-7.01 ; 13.196,-6.74 cw(c13.377,-6.74) 13.249,-6.612 ccw(c13.377,-6.74) 13.196,-6.74 ; 13.196,-6.74 ccw(c13.015,-6.74) 13.143,-6.612 cw(c13.015,-6.74) 13.196,-6.74 ; R1.1@13.326,-7.569 cw(c13.326,-7.147) 13.027,-7.445 ccw(c13.326,-7.147) R1.1@13.326,-7.569 ; R1.1@13.326,-7.569 ccw(c13.326,-7.992) 13.027,-7.693 cw(c13.326,-7.992) R1.1@13.326,-7.569 ; v1@12.927,-7.562 cw(c13.285,-7.451) 13.02,-7.186 ccw(c13.285,-7.451) v1@12.927,-7.562 ; v1@13.045,-7.569 cw(c13.045,-8.088) 13.412,-7.721 ccw(c13.045,-8.088) v1@13.045,-7.569 ; 13.167,-7.569 ccw(c13.167,-7.224) 13.412,-7.468 cw(c13.167,-7.224) 13.167,-7.569 ; U4.39@41.856,-3.411 cw(c41.856,-4.353) 42.523,-3.687 ccw(c41.856,-4.353) U4.39@41.856,-3.411 ; 42.218,-3.411 cw(c42.218,-3.991) 42.629,-3.581 ccw(c42.218,-3.991) 42.218,-3.411
  Bottom Layer w0.15: v1(12.903,-7.569) 13.487,-8.153 24.486,-8.153 30.226,-2.413 33.96,-2.413 36.881,-5.334 41.656,-5.334 42.647,-4.343 v1(42.647,-3.563) ; 13.202,-7.868 cw(c13.501,-7.569) 13.078,-7.569 ccw(c13.501,-7.569) 13.202,-7.868 ; 13.202,-7.868 ccw(c12.903,-8.167) 12.903,-7.744 cw(c12.903,-8.167) 13.202,-7.868 ; 42.647,-3.985 cw(c43.069,-3.985) 42.77,-3.687 ccw(c43.069,-3.985) 42.647,-3.985 ; 42.647,-3.985 ccw(c42.224,-3.985) 42.523,-3.687 cw(c42.224,-3.985) 42.647,-3.985
DCDC_5V: C2.2 C7.2 C25.2 C26.1 L1.2 R2.1 R43.1 U3.2 | length 141
  Top Layer w0.3: R2.1@26.441,-3.988 26.467,-3.962 C7.2@27.483,-3.962 ; C7.2@27.635,-3.962 28.067,-3.962 28.397,-4.293 29.235,-5.131 29.235,-6.401 ; R43.1@28.905,-5.188 cw(c28.598,-5.495) 29.032,-5.495 ; 29.032,-6.325 R43.1@29.032,-5.131 ; 29.032,-5.755 ccw(c30.237,-5.755) C26.1@29.385,-6.607 ; 29.032,-5.734 cw(c29.805,-5.734) R43.1@29.258,-5.188 ; R43.1@29.286,-5.011 29.286,-6.452 29.235,-6.401 ; L1.2@24.79,-8.052 24.79,-7.392 ; L1.2@24.79,-8.052 24.79,-7.722 25.921,-6.591 C2.2@26.314,-6.591 ; L1.2@24.79,-8.052 24.854,-8.052 C2.2@26.314,-6.591 ; L1.2@24.79,-7.552 ccw(c24.79,-7.141) 25.08,-7.432 cw(c24.79,-7.141) L1.2@24.79,-7.552 ; L1.2@24.79,-7.552 ccw(c24.79,-6.191) 25.752,-7.153 cw(c24.79,-6.191) L1.2@24.79,-7.552 ; 24.79,-7.392 cw(c24.593,-7.392) 24.664,-7.575 ccw(c24.593,-7.392) 24.79,-7.392 ; 24.79,-7.392 ccw(c24.987,-7.392) 24.916,-7.575 cw(c24.987,-7.392) 24.79,-7.392 ; 24.79,-7.392 25.857,-6.325 30.099,-6.325 ; L1.2@25.14,-7.902 cw(c27.217,-7.902) 25.748,-6.433 ccw(c27.217,-7.902) L1.2@25.14,-7.902 ; L1.2@25.14,-7.902 cw(c26.42,-7.902) 25.515,-6.997 ccw(c26.42,-7.902) L1.2@25.14,-7.902 ; L1.2@25.14,-7.902 cw(c25.469,-7.902) 25.237,-7.669 ccw(c25.469,-7.902) L1.2@25.14,-7.902 ; C2.2@26.046,-6.714 cw(c26.611,-6.93) 26.611,-6.325 ; C2.2@26.046,-6.714 cw(c26.611,-6.93) 26.611,-6.325 ; C2.2@26.046,-6.714 cw(c26.611,-6.93) 26.611,-6.325 ; C2.2@26.046,-6.714 cw(c26.611,-6.93) 26.611,-6.325 ; C2.2@26.314,-6.591 30.34,-6.591 30.607,-6.325 30.099,-6.325 ; C2.2@26.314,-6.591 26.581,-6.325 ; C2.2@26.326,-6.821 cw(c27.047,-7.096) 27.047,-6.325 ; C2.2@26.326,-6.821 cw(c27.047,-7.096) 27.047,-6.325 ; C2.2@26.326,-6.821 cw(c27.047,-7.096) 27.047,-6.325 ; C2.2@26.326,-6.821 cw(c27.047,-7.096) 27.047,-6.325 ; C2.2@26.342,-6.797 cw(c26.837,-7.292) 26.837,-6.591 ccw(c26.837,-7.292) C2.2@26.342,-6.797 ; C2.2@26.342,-6.797 cw(c27.481,-7.936) 27.481,-6.325 ccw(c27.481,-7.936) C2.2@26.342,-6.797 ; C2.2@26.391,-7.03 ccw(c26.391,-9.225) 24.839,-7.673 cw(c26.391,-9.225) C2.2@26.391,-7.03 ; C2.2@26.391,-7.03 ccw(c26.391,-8.274) 25.511,-7.395 cw(c26.391,-8.274) C2.2@26.391,-7.03 ; C2.2@26.391,-6.73 ccw(c26.391,-8.2) 25.351,-7.161 cw(c26.391,-8.2) C2.2@26.391,-6.73 ; C2.2@26.391,-6.73 ccw(c26.391,-7.25) 26.023,-6.882 cw(c26.391,-7.25) C2.2@26.391,-6.73 ; C2.2@26.554,-7.009 cw(c27.561,-8.016) 27.561,-6.591 ccw(c27.561,-8.016) C2.2@26.554,-7.009 ; C2.2@26.554,-7.009 cw(c28.205,-8.66) 28.205,-6.325 ccw(c28.205,-8.66) C2.2@26.554,-7.009 ; 26.581,-6.325 ccw(c26.774,-6.518) 26.566,-6.695 cw(c26.774,-6.518) 26.581,-6.325 ; 26.581,-6.325 27.483,-6.325 ; 26.581,-6.325 27.483,-6.325 ; C2.2@26.606,-6.928 cw(c27.483,-7.263) 27.483,-6.325 ; C2.2@26.606,-6.928 cw(c27.483,-7.263) 27.483,-6.325 ; C2.2@26.606,-6.928 cw(c27.483,-7.263) 27.483,-6.325 ; C2.2@26.606,-6.928 cw(c27.483,-7.263) 27.483,-6.325 ; 27.483,-6.325 30.099,-6.325 ; C25.2@27.679,-6.584 cw(c28.306,-7.212) 28.306,-6.325 ; C25.2@27.679,-6.584 cw(c28.306,-7.212) 28.306,-6.325 ; C25.2@27.679,-6.584 cw(c28.306,-7.212) 28.306,-6.325 ; C25.2@27.679,-6.584 cw(c28.306,-7.212) 28.306,-6.325 ; C25.2@27.777,-7.009 ccw(c26.769,-8.016) 26.769,-6.591 cw(c26.769,-8.016) C25.2@27.777,-7.009 ; C25.2@27.777,-7.009 ccw(c26.125,-8.66) 26.125,-6.325 cw(c26.125,-8.66) C25.2@27.777,-7.009 ; C25.2@27.891,-6.797 cw(c28.387,-7.292) 28.387,-6.591 ccw(c28.387,-7.292) C25.2@27.891,-6.797 ; C25.2@27.891,-6.797 cw(c29.031,-7.936) 29.031,-6.325 ; C25.2@27.891,-6.797 cw(c29.031,-7.936) 29.031,-6.325 ; C25.2@27.891,-6.797 cw(c29.031,-7.936) 29.031,-6.325 ; C25.2@27.891,-6.797 cw(c29.031,-7.936) 29.031,-6.325 ; C25.2@27.989,-6.797 ccw(c27.493,-7.292) 27.493,-6.591 cw(c27.493,-7.292) C25.2@27.989,-6.797 ; C25.2@27.989,-6.797 ccw(c26.849,-7.936) 26.849,-6.325 cw(c26.849,-7.936) C25.2@27.989,-6.797 ; C25.2@28.103,-7.009 cw(c29.111,-8.016) 29.111,-6.591 ccw(c29.111,-8.016) C25.2@28.103,-7.009 ; C25.2@28.103,-7.009 cw(c29.755,-8.66) 29.755,-6.325 ; C25.2@28.103,-7.009 cw(c29.755,-8.66) 29.755,-6.325 ; C25.2@28.103,-7.009 cw(c29.755,-8.66) 29.755,-6.325 ; C25.2@28.103,-7.009 cw(c29.755,-8.66) 29.755,-6.325 ; 28.202,-6.325 cw(c28.202,-7.79) C26.1@29.238,-6.754 ; 28.202,-6.325 cw(c28.202,-7.79) C26.1@29.238,-6.754 ; 28.202,-6.325 cw(c28.202,-7.79) C26.1@29.238,-6.754 ; 28.202,-6.325 cw(c28.202,-7.79) C26.1@29.238,-6.754 ; 28.926,-6.325 cw(c28.926,-7.066) C26.1@29.45,-6.542 ; 28.926,-6.325 cw(c28.926,-7.066) C26.1@29.45,-6.542 ; 28.926,-6.325 cw(c28.926,-7.066) C26.1@29.45,-6.542 ; 28.926,-6.325 cw(c28.926,-7.066) C26.1@29.45,-6.542 ; 29.043,-6.325 cw(c29.043,-8.194) U3.2@30.364,-6.872 ; 29.043,-6.325 cw(c29.043,-8.194) U3.2@30.364,-6.872 ; 29.043,-6.325 cw(c29.043,-8.194) U3.2@30.364,-6.872 ; 29.043,-6.325 cw(c29.043,-8.194) U3.2@30.364,-6.872 ; R43.1@29.06,-5.188 cw(c28.636,-5.612) 29.235,-5.612 ccw(c28.636,-5.612) R43.1@29.06,-5.188 ; R43.1@29.06,-5.188 cw(c28.514,-5.734) 29.286,-5.734 ccw(c28.514,-5.734) R43.1@29.06,-5.188 ; C26.1@29.141,-6.584 cw(c29.585,-6.835) 29.585,-6.325 ; C26.1@29.141,-6.584 cw(c29.585,-6.835) 29.585,-6.325 ; C26.1@29.141,-6.584 cw(c29.585,-6.835) 29.585,-6.325 ; C26.1@29.141,-6.584 cw(c29.585,-6.835) 29.585,-6.325 ; 29.235,-6.401 ccw(c29.438,-6.401) 29.354,-6.585 cw(c29.438,-6.401) 29.235,-6.401 ; C26.1@29.238,-6.754 ccw(c28.846,-7.146) 28.846,-6.591 cw(c28.846,-7.146) C26.1@29.238,-6.754 ; C26.1@29.385,-6.607 cw(c29.747,-6.245) 29.235,-6.245 ccw(c29.747,-6.245) C26.1@29.385,-6.607 ; C26.1@29.385,-6.607 cw(c29.624,-6.368) 29.286,-6.368 ccw(c29.624,-6.368) C26.1@29.385,-6.607 ; C26.1@29.402,-6.731 cw(c30.099,-7.125) 30.099,-6.325 ; C26.1@29.402,-6.731 cw(c30.099,-7.125) 30.099,-6.325 ; C26.1@29.402,-6.731 cw(c30.099,-7.125) 30.099,-6.325 ; C26.1@29.402,-6.731 cw(c30.099,-7.125) 30.099,-6.325 ; R43.1@29.413,-5.188 ccw(c29.843,-5.618) 29.235,-5.618 cw(c29.843,-5.618) R43.1@29.413,-5.188 ; R43.1@29.413,-5.188 ccw(c29.721,-5.495) 29.286,-5.495 cw(c29.721,-5.495) R43.1@29.413,-5.188 ; 29.767,-6.325 cw(c29.767,-7.469) U3.2@30.577,-6.66 ; 29.767,-6.325 cw(c29.767,-7.469) U3.2@30.577,-6.66 ; 29.767,-6.325 cw(c29.767,-7.469) U3.2@30.577,-6.66 ; 29.767,-6.325 cw(c29.767,-7.469) U3.2@30.577,-6.66 ; U3.2@30.364,-6.872 ccw(c29.687,-7.55) 29.687,-6.591 cw(c29.687,-7.55) U3.2@30.364,-6.872 ; L1.2@24.79,-7.852 ccw(c24.79,-7.215) 25.24,-7.665 cw(c24.79,-7.215) L1.2@24.79,-7.852 ; L1.2@24.84,-7.902 cw(c26.193,-7.902) 25.236,-6.945 ccw(c26.193,-7.902) L1.2@24.84,-7.902 ; L1.2@24.999,-7.907 cw(c26.391,-9.298) 26.391,-7.33 ccw(c26.391,-9.298) L1.2@24.999,-7.907 ; C2.2@26.13,-6.584 cw(c26.757,-7.212) 26.757,-6.325 ccw(c26.757,-7.212) C2.2@26.13,-6.584 ; R2.1@26.515,-4.061 cw(c26.754,-4.3) 26.754,-3.962 ccw(c26.754,-4.3) R2.1@26.515,-4.061 ; 27.574,-6.325 cw(c27.574,-7.212) 28.201,-6.584 ccw(c27.574,-7.212) 27.574,-6.325 ; 28.631,-4.526 cw(c28.145,-5.011) 28.832,-5.011 ccw(c28.145,-5.011) 28.631,-4.526 ; 28.713,-4.609 ccw(c29.082,-4.241) 29.082,-4.761 cw(c29.082,-4.241) 28.713,-4.609 ; 29.134,-6.299 cw(c28.897,-6.536) 29.213,-6.646 ccw(c28.897,-6.536) 29.134,-6.299 ; C26.1@29.385,-6.754 cw(c29.777,-7.146) 29.777,-6.591 ccw(c29.777,-7.146) C26.1@29.385,-6.754 ; 29.993,-6.591 ccw(c29.993,-6.066) 30.364,-6.438 cw(c29.993,-6.066) 29.993,-6.591
GND: C1.1 C2.1 C3.1 C4.2 C5.1 C6.1 C10.1 C11.1 C12.1 C14.1 C15.1 C23.1 C24.2 C25.1 C26.2 C27.1 C28.2 C29.1 DS1.2 FU1.1 GND.1 P2.1 P2.3 P2.4 P3.0 P3.0/2 P3.7 P6.1 P6.3 P6.4 Q3.2 Q4.2 Q5.2 Q6.2 Q7.2 Q8.2 Q11.2 Q12.2 Q13.2 R3.2 R5.2 R30.2 R31.2 R35.2 R36.2 R37.2 R38.2 R46.2 R47.1 R49.2 U1.2 U2.2 U2.9 U3.3 U4.0
  other v1: 27.203,-9.474 11.76,-9.449 29.362,-9.423 32.207,-9.398 10.211,-9.373 1.778,-9.119 114.808,-9.068 2.997,-9.017 0.864,-8.992 3.759,-8.992 5.258,-8.89 6.96,-8.89 29.743,-8.153 7.442,-8.103 108.331,-7.595 98.857,-7.239 110.896,-6.985 19.228,-6.96 102.235,-6.807 98.857,-6.629 95.783,-6.172 91.643,-5.944 2.87,-5.893 110.922,-5.613 48.514,-5.309 47.981,-5.156 0.864,-5.08 48.946,-5.08 114.173,-4.877 8.255,-4.826 7.163,-4.775 2.794,-4.75 5.664,-4.724 1.422,-4.699 4.115,-4.699 99.009,-4.394 23.495,-4.369 25.222,-4.343 39.624,-3.912 38.252,-3.861 67.767,-3.556 37.637,-3.481 38.967,-3.481 40.297,-3.481 72.136,-3.251 89.738,-3.226 104.775,-3.124 81.001,-3.023 91.44,-2.921 75.082,-2.667 72.517,-2.515 25.248,-1.778 47.981,-1.727 48.59,-1.6 100.736,-1.575 28.473,-1.473 106.299,-1.448 44.831,-1.397 113.005,-1.219 115.265,-1.118
GREEN: R34.2 U4.8 | length 70.2
  Top Layer w0.127: v1@68.529,-7.366 v1(68.478,-7.417) 73.203,-7.417 73.99,-7.417 v1(74.32,-7.087) ; v1(79.553,-3.023) R34.2@79.553,-2.159 ; 68.929,-7.417 cw(c68.929,-6.967) 68.61,-7.285 ccw(c68.929,-6.967) 68.929,-7.417 ; 68.929,-7.417 ccw(c68.929,-7.867) 68.61,-7.549 cw(c68.929,-7.867) 68.929,-7.417 ; 79.553,-2.695 cw(c80.013,-2.695) 79.688,-2.37 ccw(c80.013,-2.695) 79.553,-2.695 ; 79.553,-2.695 ccw(c79.093,-2.695) 79.418,-2.37 cw(c79.093,-2.695) 79.553,-2.695 ; 79.553,-2.572 cw(c79.103,-2.572) 79.421,-2.891 ccw(c79.103,-2.572) 79.553,-2.572 ; 79.553,-2.572 ccw(c80.003,-2.572) 79.685,-2.891 cw(c80.003,-2.572) 79.553,-2.572
  Top Layer w0.15: v1@33.503,-5.791 34.658,-4.635 34.658,-2.984 36.347,-1.295 37.637,-1.295 37.967,-1.626 U4.8@37.967,-1.854 ; v1@33.503,-5.642 ccw(c33.503,-5.28) 33.758,-5.536 cw(c33.503,-5.28) v1@33.503,-5.642 ; v1@33.678,-5.817 cw(c34.161,-5.817) 33.819,-5.474 ccw(c34.161,-5.817) v1@33.678,-5.817
  Bottom Layer w0.127: 34.364,-5.942 35.027,-6.604 40.132,-6.604 41.173,-7.645 49.911,-7.645 51.206,-6.35 66.294,-6.35 67.361,-7.417 v1(68.478,-7.417) v1@68.428,-7.366 ; v1(74.32,-7.087) 76.784,-7.087 79.553,-4.318 v1(79.553,-3.023) ; 68.028,-7.417 cw(c68.028,-7.867) 68.347,-7.549 ccw(c68.028,-7.867) 68.028,-7.417 ; 68.028,-7.417 ccw(c68.028,-6.967) 68.347,-7.285 cw(c68.028,-6.967) 68.028,-7.417 ; 74.771,-7.087 cw(c74.771,-6.636) 74.452,-6.955 ccw(c74.771,-6.636) 74.771,-7.087 ; 74.771,-7.087 ccw(c74.771,-7.537) 74.452,-7.218 cw(c74.771,-7.537) 74.771,-7.087 ; 79.553,-3.473 cw(c80.003,-3.473) 79.685,-3.154 ccw(c80.003,-3.473) 79.553,-3.473 ; 79.553,-3.473 ccw(c79.103,-3.473) 79.421,-3.154 cw(c79.103,-3.473) 79.553,-3.473
  Bottom Layer w0.15: v1(33.503,-5.817) 34.239,-5.817 34.364,-5.942 ; 33.925,-5.817 cw(c33.925,-5.394) 33.626,-5.693 ccw(c33.925,-5.394) 33.925,-5.817 ; 33.925,-5.817 ccw(c33.925,-6.239) 33.626,-5.94 cw(c33.925,-6.239) 33.925,-5.817
HO1: R39.2 U4.29 | length 18.7
  Top Layer w0.127: U4.29@40.367,-7.112 U4.29@40.367,-7.361 40.367,-7.88 40.64,-8.153 52.248,-8.153 55.538,-8.153 56.082,-7.61 R39.2@56.082,-7.585 ; 40.367,-7.827 cw(c40.503,-7.827) 40.407,-7.731 ccw(c40.503,-7.827) 40.367,-7.827 ; 40.367,-7.827 ccw(c40.231,-7.827) 40.327,-7.731 cw(c40.231,-7.827) 40.367,-7.827 ; 55.713,-7.979 cw(c56.082,-8.347) 56.082,-7.826 ccw(c56.082,-8.347) 55.713,-7.979 ; 55.774,-7.917 ccw(c55.493,-7.636) 55.891,-7.636 cw(c55.493,-7.636) 55.774,-7.917
HO2: R17.2 U4.25 | length 27
  Top Layer w0.127: U4.25@38.767,-7.137 U4.25@38.767,-7.361 38.767,-8.643 38.989,-8.865 60.757,-8.865 61.443,-8.179 R17.2@61.443,-7.585 ; 38.767,-7.827 cw(c38.903,-7.827) 38.807,-7.731 ccw(c38.903,-7.827) 38.767,-7.827 ; 38.767,-7.827 ccw(c38.631,-7.827) 38.727,-7.731 cw(c38.631,-7.827) 38.767,-7.827 ; 61.443,-8.121 cw(c61.903,-8.121) 61.577,-7.796 ccw(c61.903,-8.121) 61.443,-8.121 ; 61.443,-8.121 ccw(c60.983,-8.121) 61.308,-7.796 cw(c60.983,-8.121) 61.443,-8.121
HO3: R4.2 U4.22 | length 34.1
  Top Layer w0.127: U4.22@37.567,-7.361 37.567,-8.509 38.608,-9.55 65.837,-9.55 66.953,-8.434 R4.2@66.953,-7.849 ; 37.567,-7.827 cw(c37.703,-7.827) 37.607,-7.731 ccw(c37.703,-7.827) 37.567,-7.827 ; 37.567,-7.827 ccw(c37.431,-7.827) 37.527,-7.731 cw(c37.431,-7.827) 37.567,-7.827 ; 66.953,-8.086 cw(c67.413,-8.086) 67.088,-7.761 ccw(c67.413,-8.086) 66.953,-8.086 ; 66.953,-8.086 ccw(c66.493,-8.086) 66.818,-7.761 cw(c66.493,-8.086) 66.953,-8.086
  Top Layer w0.15: R4.2@66.953,-7.849 R4.2@66.953,-7.626